# EAGLE board Jetson_PCB_BRD (EAGLE 9.5.0)
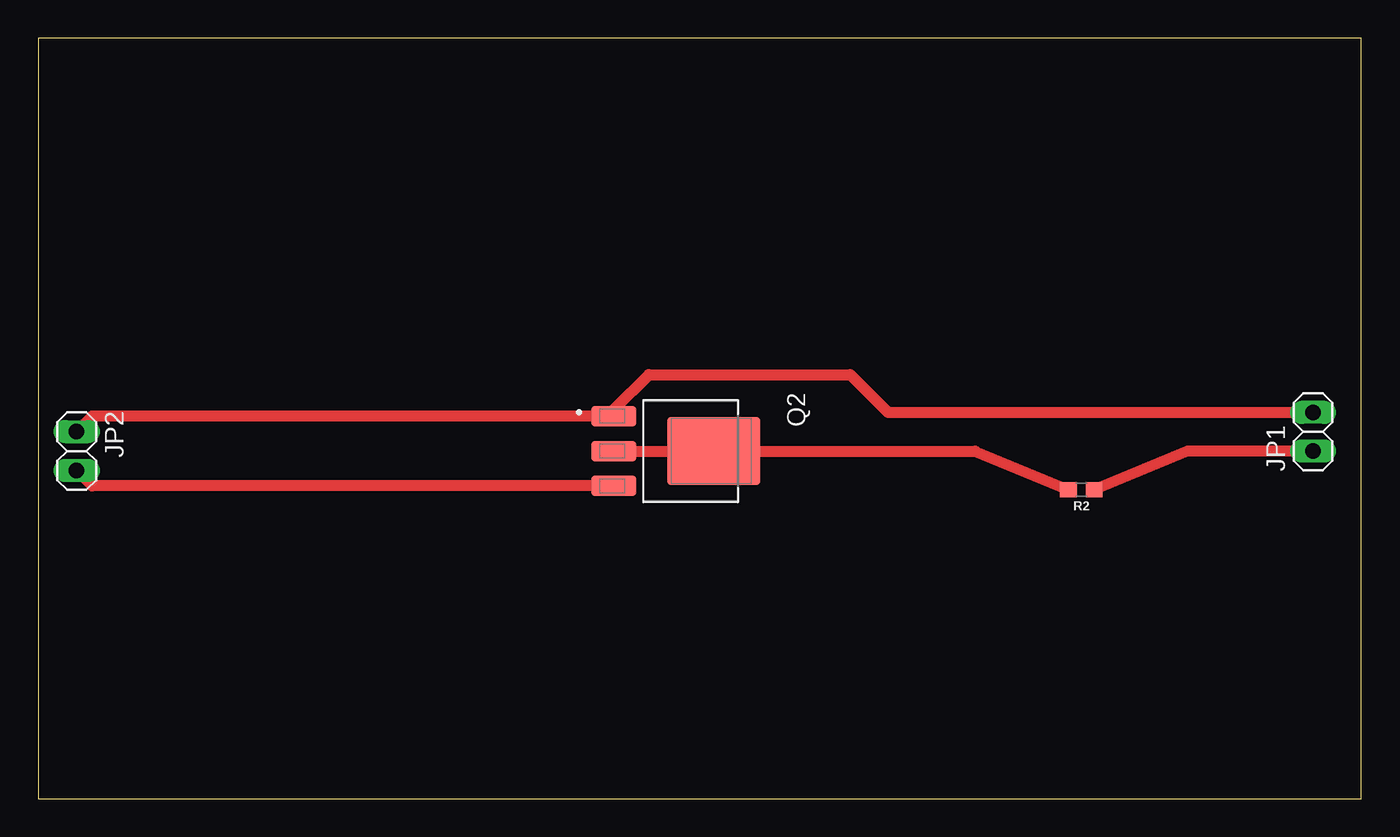
[diagram p0: board, top side]

Size 87 x 50 mm. Coordinates in mm from the lower left corner, seen from the top.
Outline: 0,0 87,0 87,50 0,50 0,0
Copper layers (1*16): Top 0.035mm / dielectric 1.5mm / Bottom 0.035mm
Design rules "default": minimum track width 6mil, minimum drill 0.35mm, track to track 6mil, track to pad 6mil, pad to pad 6mil, via to via 6mil, smd to smd 6mil, copper to edge 40mil, drill to drill 6mil, minimum pad ring 10mil, minimum via ring 8mil, stop-mask expansion 4mil, vias tented up to drill 0mil, thermal gap 10mil

## Footprints (pad centres in the part's own frame; a part is rotated, then mirrored left to right if it is on the bottom)
1X02 = drill 1.016 long: 1 -1.27,0; 2 1.27,0
DPAK4 = smd 1.36 x 2.98: 1 -2.29,-4.07; 2 0,-4.07; 3 2.29,-4.07 | smd 4.49 x 6.1: 4 0,2.51
0603 = smd 1.1 x 1: 1 -0.85,0; 2 0.85,0

## Placement (x,y rotation side)
JP1  [1X02]  83.82,24.13 90 top
JP2  [1X02]  2.54,22.86 270 top
Q2  NTD3055L104G  [DPAK4]  41.91,22.86 270 top
R2  1.8M  [0603]  68.58,20.32 180 top

## Library data of the parts
JP1 JP2 = pinhead
Q2 = Transistor; CREATED_BY: PCBLayout.com; MANUFACTURER: ON SEMICONDUCTORS; MPN: NTD3055L104G; PACKAGE: DPAK-4
R2 = SparkFun-Resistors; PROD_ID: RES-13994

## Nets
N$1: JP1.2 JP2.1 Q2.1
N$2: JP1.1 R2.1
N$3: Q2.2 Q2.4 R2.2
N$4: JP2.2 Q2.3

## Tracks (layer width: path | path; a pad name or v marks a point on that pad's centre or on a via)
N$1
  Top 0.716: JP2.1 3.56,25.15 Q2.1 37.84,25.56 40.15,27.87 53.41,27.87 55.88,25.4 JP1.2
N$2
  Top 0.716: JP1.1 75.56,22.86 R2.1
N$3
  Top 0.716: Q2.2 Q2.4 61.6,22.86 R2.2
N$4
  Top 0.716: Q2.3 3.56,20.57 JP2.2